# Altium PCB OpenDriver.PcbDoc (part 1 of 2)
Units mil, origin at the board's own origin, x right, y up, seen from the top; angles counter-clockwise.
Board outline 3900 x 2100 mil, 2 copper layers (Top Layer, Bottom Layer); 70 components, 50 nets, 317 pads, 234 vias.
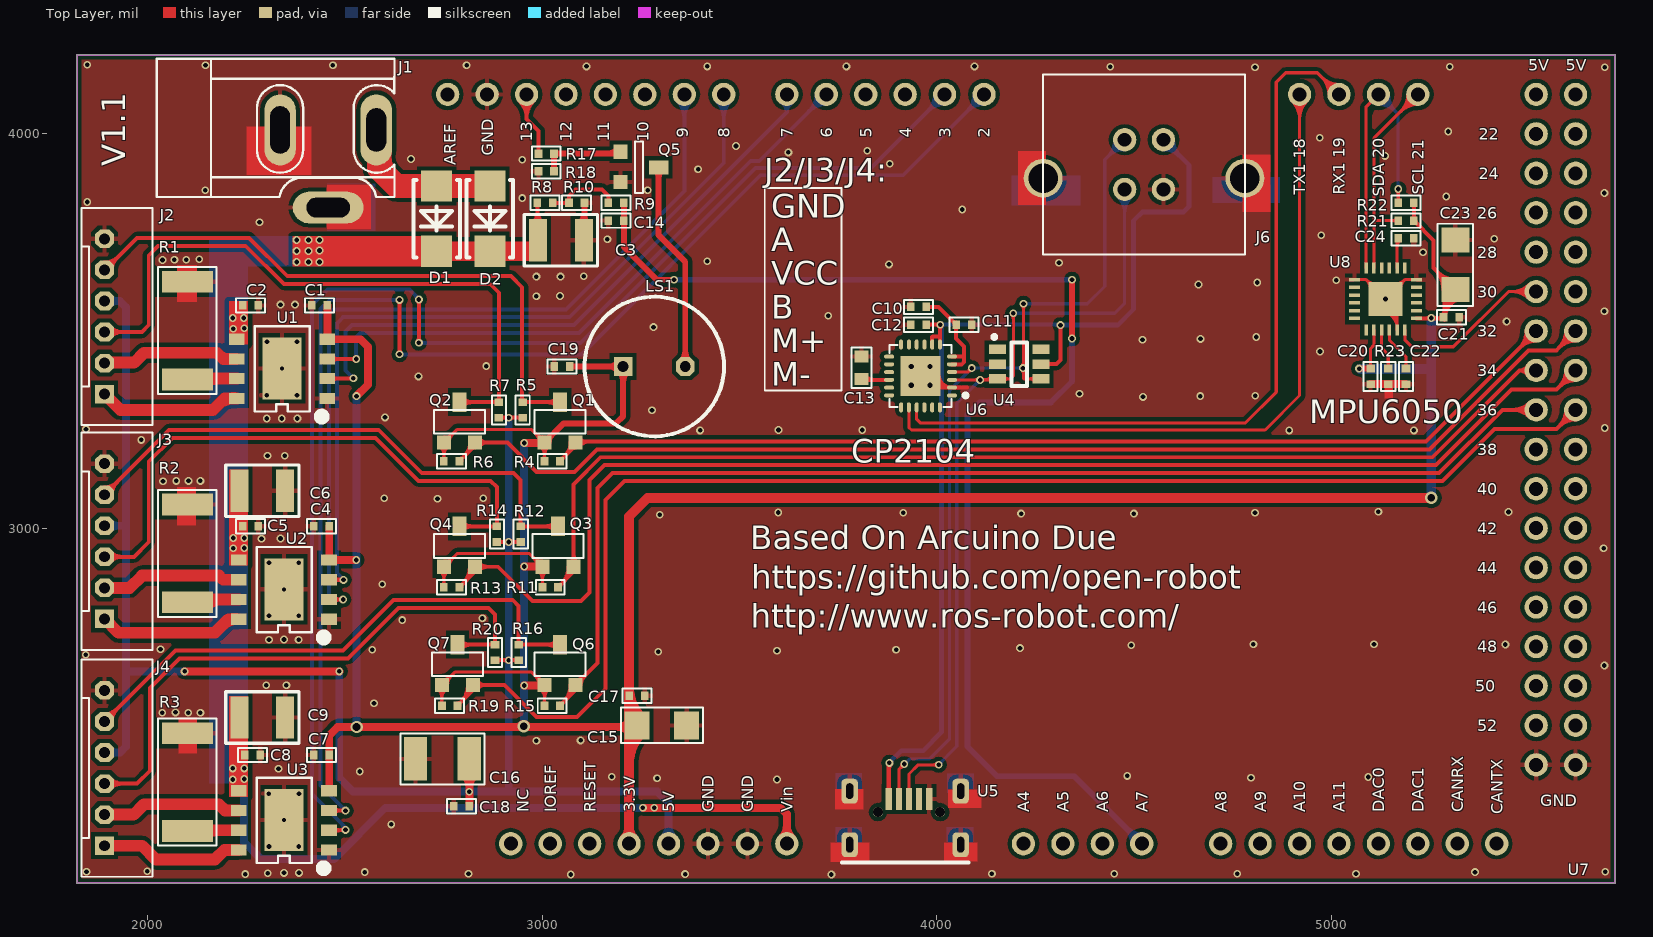
[diagram p0: Top Layer view]
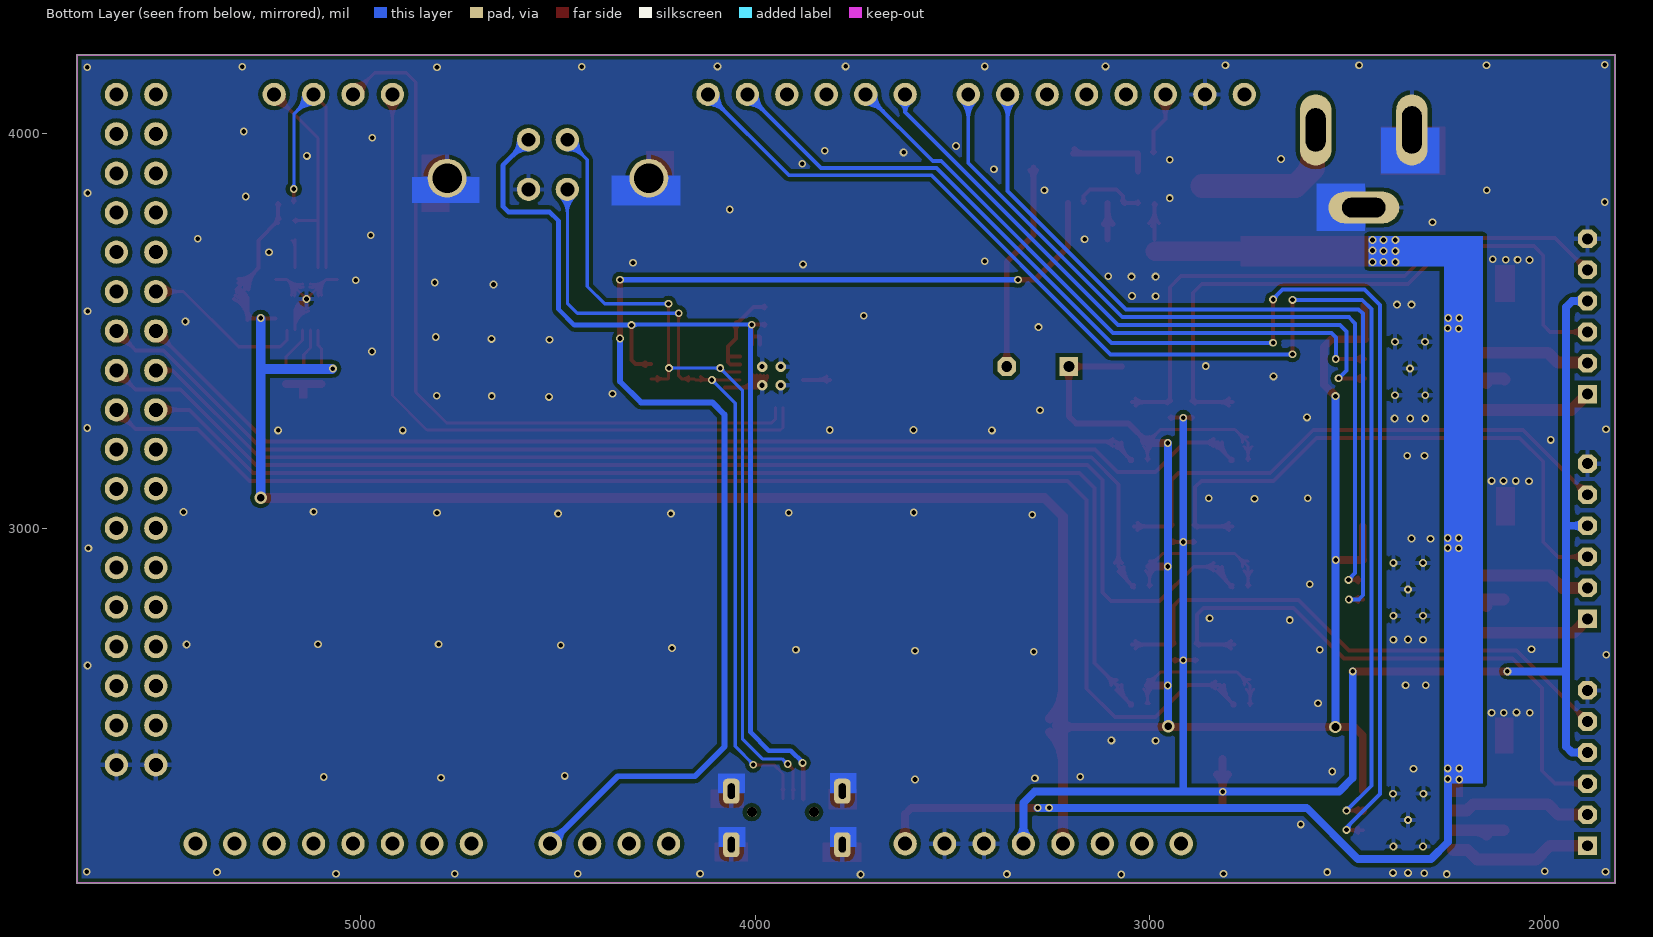
[diagram p1: Bottom Layer view, seen from below]

## Layer stack, top to bottom
Top Layer: signal copper 1.4
Dielectric: dielectric 12.6, FR-4, Dk 4.8
Bottom Layer: signal copper 1.4

## Board outline
1820,4200 1820,2100 5720,2100 5720,4200 1820,4200

## Design rules (kind name [scope] priority, off if disabled: settings)
Clearance [All] p1: gap=10
HoleSize [All] p1: absolutevalues=TRUE maxlimit=100 minlimit=11.81 maxpercent=80.000 minpercent=20.000
MinimumSolderMaskSliver [All] p1: minsoldermaskwidth=1
PlaneConnect [All] p1: planeconnectstyle=Relief reliefexpansion=20 reliefentries=4 reliefconductorwidth=12 reliefairgap=10
PolygonConnect [All] p1: connectstyle=Relief reliefconductorwidth=12 reliefentries=4 polygonreliefangle="90 Angle"
RoomDefinition CP2104 [InComponentClass('CP2104')] p1: confinementstyle=ConfineIn formatcopy=TRUE lockcomponents=FALSE outline 0,0 2000,0 2000,1000 0,1000
RoomDefinition OpenDriver [InComponentClass('OpenDriver')] p2: confinementstyle=ConfineIn formatcopy=TRUE lockcomponents=FALSE outline 0,0 2000,0 2000,1000 0,1000
RoomDefinition MPU6050 [InComponentClass('MPU6050')] p3: confinementstyle=ConfineIn formatcopy=TRUE lockcomponents=FALSE outline 0,0 2000,0 2000,1000 0,1000
RoomDefinition ArduinoDue [InComponentClass('ArduinoDue')] p4: confinementstyle=ConfineIn formatcopy=TRUE lockcomponents=FALSE outline 0,0 2000,0 2000,1000 0,1000
RoomDefinition A4950 [InComponentClass('A4950')] p5: confinementstyle=ConfineIn formatcopy=TRUE lockcomponents=FALSE outline 0,0 2000,0 2000,1000 0,1000
RoutingVias [All] p1: holewidth=28 width=50 viastyle="Through Hole" minholewidth=28 minwidth=50 maxholewidth=28 maxwidth=50
SilkToSilkClearance [All] p1: silktosilkclearance=0
SilkscreenOverComponentPads [All] p1: minsilkscreentomaskgap=0
SolderMaskExpansion [All] p1: expansion=4
TestPointUsage [All] p1: valid=0 allowmultiple=FALSE
Testpoint [All] p1: side=15 testpointundercomponent=TRUE minsize=40 maxsize=100 preferedsize=60 minholesize=0 maxholesize=40 preferedholesize=32 testpointgrid=1 style=1023 order=0123456789
Width [All] p1: maxlimit=100 minlimit=6 preferedwidth=10
19 further rules are at their usual default settings.

## Classes and differential pairs
component class OpenDriver: D1 D2 J1 J2 J3 J4
component class MPU6050: C20 C21 C22 C23 C24 R21 R22 R23 U8
component class CP2104: C10 C11 C12 C13 J6 U4 U5 U6
component class ArduinoDue: C14 C15 C16 C17 C18 C19 LS1 Q1 Q2 Q3 Q4 Q5 Q6 Q7 R4 R5 R6 R7 R8 R9 R10 R11 R12 R13 R14 R15 R16 R17 R18 R19 R20 U7
component class A4950: C1 C2 C3 C4 C5 C6 C7 C8 C9 R1 R2 R3 U1 U2 U3

## Components (designator, comment, footprint, x,y, rotation, side; value= is the part's Value field where it differs from the comment)
C1 "Cap" "dq - 0402" 2435,3565 r0 top
C2 "Cap" "dq - 0402" 2260,3565 r180 top
C3 "Cap" "dq - 1210" 3047,3730 r180 top
C4 "Cap" "dq - 0402" 2440,3005 r0 top
C5 "Cap" "dq - 0402" 2260,3005 r180 top
C6 "Cap" "dq - 1210" 2290,3095 r180 top
C7 "Cap" "dq - 0402" 2440,2425 r0 top
C8 "Cap" "dq - 0402" 2265,2425 r180 top
C9 "Cap" "dq - 1210" 2290,2520 r180 top
C10 "Cap" "dq - 0402" 3954,3561 r0 top
C11 "Cap" "dq - 0402" 4069,3516 r180 top
C12 "Cap" "dq - 0402" 3954,3516 r0 top
C13 "Cap" "dq - 0603" 3809,3406 r90 top
C14 "Cap" "dq - 0402" 3187,3780 r0 top
C15 "Cap_Pol" 3216-18 3240,2500 r0 top
C16 "Cap_Pol" 3528-21 2815,2415 r270 top
C17 "Cap" "dq - 0402" 3240,2575 r180 top
C18 "Cap" "dq - 0402" 2795,2295 r0 top
C19 "Cap" "dq - 0402" 3050,3410 r0 top
C20 "Cap" "dq - 0402" 5100,3385 r90 top
C21 "Cap" "dq - 0402" 5305,3535 r180 top
C22 "Cap" "dq - 0402" 5190,3385 r270 top
C23 "Cap_Pol" 3216-18 5315,3605 r90 top
C24 "Cap" "dq - 0402" 5190,3735 r0 top
D1 "SS54" LC-SMA(DO-214AC)_S2 2732,3785 r90 top
D2 "SS54" LC-SMA(DO-214AC)_S2 2867,3785 r90 top
J1 "DC-005 5.5-2.5mm" DC10B 2160,3840 r0 top
J2 "PH2.0-6P" PH-6P 1890,3340 r90 top
J3 "PH2.0-6P" PH-6P 1890,2770 r90 top
J4 "PH2.0-6P" PH-6P 1890,2195 r90 top
J6 "USB" USB-Square-Vertical 4575,3985 r0 top
LS1 "9*4.2mm" BUZZER-9*4.2MM 3205,3410 r0 top
Q1 "AO3400" "SOT-23-3 - AO3400" 3045,3300 r0 top
Q2 "AO3400" "SOT-23-3 - AO3400" 2790,3300 r0 top
Q3 "AO3400" "SOT-23-3 - AO3400" 3040,2985 r0 top
Q4 "AO3400" "SOT-23-3 - AO3400" 2790,2985 r0 top
Q5 "8050" SOT-23-3 3295,3915 r270 top
Q6 "AO3400" "SOT-23-3 - AO3400" 3045,2685 r0 top
Q7 "AO3400" "SOT-23-3 - AO3400" 2785,2685 r0 top
R1 "Res" "DQ - 2512" 2100,3625 r270 top
R2 "Res" "DQ - 2512" 2100,3060 r270 top
R3 "Res" "DQ - 2512" 2100,2480 r270 top
R4 "Res" "dq - 0402" 3025,3170 r0 top
R5 "Res" "dq - 0402" 2950,3300 r90 top
R6 "Res" "dq - 0402" 2770,3170 r0 top
R7 "Res" "dq - 0402" 2890,3300 r90 top
R8 "Res" "dq - 0402" 3007,3825 r0 top
R9 "Res" "dq - 0402" 3187,3825 r0 top
R10 "Res" "dq - 0402" 3087,3825 r0 top
R11 "Res" "dq - 0402" 3020,2850 r0 top
R12 "Res" "dq - 0402" 2945,2985 r90 top
R13 "Res" "dq - 0402" 2770,2850 r0 top
R14 "Res" "dq - 0402" 2885,2985 r90 top
R15 "Res" "dq - 0402" 3025,2550 r0 top
R16 "Res" "dq - 0402" 2940,2685 r90 top
R17 "Res" "dq - 0402" 3010,3950 r180 top
R18 "Res" "dq - 0402" 3010,3905 r180 top
R19 "Res" "dq - 0402" 2765,2550 r0 top
R20 "Res" "dq - 0402" 2880,2685 r90 top
R21 "Res" "dq - 0402" 5190,3780 r180 top
R22 "Res" "dq - 0402" 5190,3825 r180 top
R23 "Res" "dq - 0402" 5145,3385 r90 top
U1 "A4950" LC-SOIC-8_150mil 2340,3405 r180 top
U2 "A4950" LC-SOIC-8_150mil 2345,2845 r180 top
U3 "A4950" LC-SOIC-8_150mil 2345,2260 r180 top
U4 "SRV05-4.TCT" LC-SOT-23-6 4209,3416 r180 top
U5 "Micro-USB-N" MICRO-USB-F 3920,2225 r0 top
U6 "CP2104" "QFN24 - T" 3959,3386 r180 top
U7 "ArduinoDue" ArduinoDue 1820,2100 r0 top locked
U8 "MPU6050" QFN-24 5075,3650 r0 top

## Footprints (in the part's own frame and the unit in brackets; to place one, negate y for a bottom-side part, rotate by r counter-clockwise, add the part's x,y. Pads: shape width x height; smd on the part's side, far side on the other; paste and mask are expansions set on the pad)
3216-18 [mm] "http://eelab.sjtu.edu.cn/news/show.aspx?id=536&cid=8"
  rect 1.6x1.8 smd: 1(0,0) 2(3.2,0)
  silkscreen extent -1.04,-1.14 4.24,1.14, body extent 0,-0.8 3.2,0.8, height 1.6
3528-21 [mm] "22uF/16V, 10uF/25V, B型钽电容"
  rect 2.8x1.5 smd: 1(0,0) 2(0,-3.475)
  silkscreen extent -1.65,-4.45 1.65,0.97, body extent -1.49,-3.57 1.51,0.13, height 2.1
ArduinoDue [mm]
  round 1.5 hole 0.9: 1(27.94,2.54) 2(30.48,2.54) 3(33.02,2.54) 4(35.56,2.54) 5(38.1,2.54) 6(40.64,2.54) 7(43.18,2.54) 8(45.72,2.54) 13(60.96,2.54) 14(63.5,2.54) 15(66.04,2.54) 16(68.58,2.54) 17(73.66,2.54) 18(76.2,2.54) 19(78.74,2.54) 20(81.28,2.54) 21(83.82,2.54) 22(86.36,2.54) 23(88.9,2.54) 24(91.44,2.54) 25(86.36,50.8) 26(83.82,50.8) 27(81.28,50.8) 28(78.74,50.8) 35(58.42,50.8) 36(55.88,50.8) 37(53.34,50.8) 38(50.8,50.8) 39(48.26,50.8) 40(45.72,50.8) 41(41.656,50.8) 42(39.116,50.8) 43(36.576,50.8) 44(34.036,50.8) 45(31.496,50.8) 46(28.956,50.8) 47(26.416,50.8) 48(23.876,50.8) 51(93.98,50.8) 52(96.52,50.8) 53(93.98,48.26) 54(96.52,48.26) 55(93.98,45.72) 56(96.52,45.72) 57(93.98,43.18) 58(96.52,43.18) 59(93.98,40.64) 60(96.52,40.64) 61(93.98,38.1) 62(96.52,38.1) 63(93.98,35.56) 64(96.52,35.56) 65(93.98,33.02) 66(96.52,33.02) 67(93.98,30.48) 68(96.52,30.48) 69(93.98,27.94) 70(96.52,27.94) 71(93.98,25.4) 72(96.52,25.4) 73(93.98,22.86) 74(96.52,22.86) 75(93.98,20.32) 76(96.52,20.32) 77(93.98,17.78) 78(96.52,17.78) 79(93.98,15.24) 80(96.52,15.24) 81(93.98,12.7) 82(96.52,12.7) 83(93.98,10.16) 84(96.52,10.16) 85(93.98,7.62) 86(96.52,7.62)
  Keep-Out Layer lines w0.127: 0,0 0,53.34 99.06,53.34 99.06,0 0,0
BUZZER-9*4.2MM [mm] "https://item.taobao.com/item.htm?spm=a230r.1.14.111.cDfJ59&id=20592199756&ns=1&abbucket=4#detail"
  rect 1.2x1.2 hole 0.7: 1(0,0)
  oct 1.2x1.2 hole 0.7: 2(4,0)
  silkscreen extent -2.5,-4.5 6.5,4.5, body extent -2.46,-4.5 6.5,4.48, height 4.2
DC10B [mil]
  oval 80x180 hole 50 slot 110 at 90 deg: 1(419.09,170)
  oval 80x180 hole 50 slot 120 at 90 deg: 2(175,170)
  oval 180x80 hole 50 slot 110 at 0 deg: 3(297.05,-26.85)
  silkscreen extent -138,0 465,350
"dq - 0402" [mm]
  rect 0.5x0.55 smd: 1(-0.5,0) 2(0.5,0)
  silkscreen extent -0.93,-0.46 0.93,0.46, body extent -0.51,-0.27 0.52,0.27, height 0.55
"dq - 0603" [mm]
  rect 0.762x0.9 smd: 1(-0.71,0) 2(0.75,0)
  silkscreen extent -1.28,-0.64 1.32,0.64, body extent -0.8,-0.45 0.81,0.45, height 0.9
"dq - 1210" [mm]
  rect 1.16x2.72 smd: 1(-1.475,0) 2(1.475,0)
  silkscreen extent -2.35,-1.66 2.36,1.66, body extent -1.6,-1.25 1.6,1.25, height 0.6
"DQ - 2512" [mm]
  rect 1.4x3.3 smd: 1(0,0) 2(6.3,0)
  silkscreen extent -0.94,-1.88 7.24,1.88, body extent 0,-1.57 6.3,1.55, height 0.55
LC-SMA(DO-214AC)_S2 [mm]
  rect 2x2 smd: 1(2.1,0) 2(-2.1,0)
  silkscreen extent -2.5,-1.5 2.5,1.5, body extent -2.2,-1.3 2.2,1.3, height 2
LC-SOIC-8_150mil [mm]
  rect 1x0.72 smd: 1(-2.898,1.925) 2(-2.898,0.655) 3(-2.898,-0.615) 4(-2.898,-1.885) 5(2.902,-1.885) 6(2.902,-0.615) 7(2.902,0.655) 8(2.902,1.925)
  rect 2.5x4 smd: 9(0,0)
  silkscreen extent -2.81,-2.73 1.75,3.35, body extent -1.9,-2.5 2.1,2.5, height 1.73
LC-SOT-23-6 [mm]
  rect 1.1x0.6 smd: 1(1.4,-0.95) 2(1.4,0) 3(1.4,0.95) 4(-1.4,0.95) 5(-1.4,0) 6(-1.4,-0.95)
  silkscreen extent -0.5,-1.87 1.72,1.4, body extent -0.89,-1.55 0.89,1.54, height 1.45
MICRO-USB-F [mm]
  round 0.65 hole 0.65: 0(-1.75,1.4) 0(2.25,1.4)
  rect 0.4x1.4 smd: 1(-1.05,2.25) 2(-0.403,2.25) 3(0.246,2.25) 4(0.897,2.25) 5(1.546,2.25)
  rrect50% 1.05x1.6 hole 0.45 slot 1 at 90 deg: 6(3.575,-0.7) 7(3.575,2.75) 8(-3.575,2.75) 9(-3.575,-0.7)
  silkscreen extent -4.08,-1.85 4.08,-1.85
PH-6P [mm] "https://item.taobao.com/item.htm?spm=a230r.1.14.30.U3UT7w&id=522574797086&ns=1&abbucket=4#detail"
  rect 1.2x1.2 hole 0.7: 1(0,0)
  oct 1.2x1.2 hole 0.7: 2(2,0) 3(4,0) 4(6,0) 5(8,0) 6(10,0)
  silkscreen extent -2,-3.1 12,1.5
"QFN24 - T" [mm]
  oval 0.65x0.25 smd: 1(-2.025,1.25) 2(-2.025,0.75) 3(-2.025,0.25) 4(-2.025,-0.25) 5(-2.025,-0.75) 6(-2.025,-1.25) 13(2.025,-1.25) 14(2.025,-0.75) 15(2.025,-0.25) 16(2.025,0.25) 17(2.025,0.75) 18(2.025,1.25)
  oval 0.25x0.65 smd: 7(-1.25,-2.025) 8(-0.75,-2.025) 9(-0.25,-2.025) 10(0.25,-2.025) 11(0.75,-2.025) 12(1.25,-2.025) 19(1.25,2.025) 20(0.75,2.025) 21(0.25,2.025) 22(-0.25,2.025) 23(-0.75,2.025) 24(-1.25,2.025)
  rect 2.6x2.6 smd: 25(0,0)
  silkscreen extent -3.03,-2 2,2, body extent -2,-2 2,2, height 0.8
QFN-24 [mm]
  rect 0.7x0.22 smd: 1(-0.4,-0.5) 2(-0.4,-1) 3(-0.4,-1.5) 4(-0.4,-2) 5(-0.4,-2.5) 6(-0.4,-3) 13(3.6,-3) 14(3.6,-2.5) 15(3.6,-2) 16(3.6,-1.5) 17(3.6,-1) 18(3.6,-0.5)
  round 0.4 on Top Overlay: 1(-0.375,0.025)
  rect 0.22x0.7 smd: 7(0.35,-3.75) 8(0.85,-3.75) 9(1.35,-3.75) 10(1.85,-3.75) 11(2.35,-3.75) 12(2.85,-3.75) 19(2.85,0.25) 20(2.35,0.25) 21(1.85,0.25) 22(1.35,0.25) 23(0.85,0.25) 24(0.35,0.25)
  rect 2.2x2.2 smd: 25(1.6,-1.75)
SOT-23-3 [mm]
  rect 0.915x0.915 smd: 1(0.95,-2.45) 2(-1,-2.45)
  rect 0.915x1.27 smd: 3(0,0)
  silkscreen extent -1.65,-1.52 1.65,-1.02, body extent -1.55,-2 1.55,-0.5, height 1.15
"SOT-23-3 - AO3400" [mm]
  rect 0.915x0.915 smd: 1(-1,-2.1) 3(1,-2.1)
  rect 0.915x1.27 smd: 2(0,0.5)
  silkscreen extent -1.65,-1.52 1.65,0, body extent -1.55,-1.5 1.55,0, height 1.15
USB-Square-Vertical [mm]
  round 1.5 hole 0.9: 1(0,0) 2(-2.5,0) 3(-2.5,-3.2) 4(0,-3.2)
  round 2.5 hole 1.9: 5(5.25,-2.475) 6(-7.75,-2.475)
  silkscreen extent -7.75,-7.4 5.25,4.2, body extent -7.7,-7.3 5.2,4.1, height 16

## Part data
C1 C2 C3 C4 C5 C6 C7 C8 C9 C10 C11 C12 C13 C14 C17 C18 C19 C20 C21 C22 C24: library part DQ_Cap, "Capacitor"
C15 C16 C23: "Capacitor"
D1 D2: library part Diode1
J1: library part DC-005
J2 J3 J4: library part PH2.0_6P
LS1: library part Buzzer_1, "Electrical Bell"
Q1 Q2 Q3 Q4 Q6 Q7: library part NMOS, "N-Channel Power MOSFET"
Q5: library part NPN
R1 R2 R3 R4 R5 R6 R7 R8 R9 R10 R11 R12 R13 R14 R15 R16 R17 R18 R19 R20 R21 R22 R23: library part DQ_Res, "Resistance"

## Via types
v1: diameter 19.68, hole 11.81, Top Layer to Bottom Layer, tented both sides, 224 vias
v2: diameter 25.98, hole 12.99, Top Layer to Bottom Layer, tented both sides, 4 vias
v3: diameter 20, hole 10, Top Layer to Bottom Layer, 3 vias
v4: diameter 31.5, hole 19.68, Top Layer to Bottom Layer, tented both sides, 3 vias

## Nets (pads, with @x,y where several pads share a name; then routed paths per layer and width w, separated by ;. In a path a pad name is that pad's centre, name@x,y a point inside that pad or via, vN(x,y) a via of type N, cw(c..) or ccw(c..) an arc to the next point about the centre after c; other vN are vias at no path point)
3.3V: C1.2 C4.2 C7.2 C15.1 C17.2 C19.2 C20.2 C21.2 C23.1 LS1.1 Q1.1 Q2.1 Q3.1 Q4.1 Q6.1 Q7.1 R4.1 R6.1 R11.1 R13.1 R15.1 R19.1 R21.1 R22.1 U1.4 U2.4 U3.4 U7.4 U8.8 U8.13 | length 12691.6
  Top Layer w8: R19.1@2745.32,2550 Q7.1@2745.32,2602.01 ; Q7.1@2745.63,2602.32 2778.31,2635 2972.95,2635 Q6.1@3005.63,2602.32 R15.1@3005.63,2555.31 ; R13.1@2750.63,2849.69 Q4.1@2750.63,2902.32 2784.31,2936 2966.95,2936 2999.95,2903 Q3.1@3000.63,2902.32 ; R6.1@2750.63,3170.31 Q2.1@2750.63,3217.32 2783.31,3250 2972.95,3250 Q1.1@3005.63,3217.32 R4.1@3005.63,3170.31 ; R11.1@3000.32,2850 Q3.1@3000.32,2902.01 ; C20.2@5100,3404.68 5100,3455 5108.46,3463.46 U8.8@5108.46,3502.36 ; 2745.32,2565.09 ccw(c2759.42,2565.09) 2749.45,2555.12 cw(c2759.42,2565.09) 2745.32,2565.09 ; 2745.32,2565.09 cw(c2731.21,2565.09) 2741.18,2555.12 ccw(c2731.21,2565.09) 2745.32,2565.09 ; 2750.63,2868.5 ccw(c2716.8,2868.5) 2740.72,2892.41 cw(c2716.8,2868.5) 2750.63,2868.5 ; 2750.63,2868.5 cw(c2784.46,2868.5) 2760.54,2892.41 ccw(c2784.46,2868.5) 2750.63,2868.5 ; 2750.63,3183.5 ccw(c2716.8,3183.5) 2740.72,3207.41 cw(c2716.8,3183.5) 2750.63,3183.5 ; 2750.63,3183.5 cw(c2784.46,3183.5) 2760.54,3207.41 ccw(c2784.46,3183.5) 2750.63,3183.5 ; 2769.55,2626.24 ccw(c2793.47,2602.32) 2759.64,2602.32 cw(c2793.47,2602.32) 2769.55,2626.24 ; 2769.55,2626.24 cw(c2745.63,2650.16) 2745.63,2616.33 ccw(c2745.63,2650.16) 2769.55,2626.24 ; 2774.55,2926.24 ccw(c2798.47,2902.32) 2764.64,2902.32 cw(c2798.47,2902.32) 2774.55,2926.24 ; 2774.55,2926.24 cw(c2750.63,2950.16) 2750.63,2916.33 ccw(c2750.63,2950.16) 2774.55,2926.24 ; 2774.55,3241.24 ccw(c2798.47,3217.32) 2764.64,3217.32 cw(c2798.47,3217.32) 2774.55,3241.24 ; 2774.55,3241.24 cw(c2750.63,3265.16) 2750.63,3231.33 ccw(c2750.63,3265.16) 2774.55,3241.24 ; 2976.71,2926.24 ccw(c3000.63,2950.16) 3000.63,2916.33 cw(c3000.63,2950.16) 2976.71,2926.24 ; 2976.71,2926.24 cw(c2952.79,2902.32) 2986.62,2902.32 ccw(c2952.79,2902.32) 2976.71,2926.24 ; 2981.71,2626.24 ccw(c3005.63,2650.16) 3005.63,2616.33 cw(c3005.63,2650.16) 2981.71,2626.24 ; 2981.71,2626.24 cw(c2957.79,2602.32) 2991.62,2602.32 ccw(c2957.79,2602.32) 2981.71,2626.24 ; 2981.71,3241.24 ccw(c3005.63,3265.16) 3005.63,3231.33 cw(c3005.63,3265.16) 2981.71,3241.24 ; 2981.71,3241.24 cw(c2957.79,3217.32) 2991.62,3217.32 ccw(c2957.79,3217.32) 2981.71,3241.24 ; 3000.32,2865.09 ccw(c3014.42,2865.09) 3004.45,2855.12 cw(c3014.42,2865.09) 3000.32,2865.09 ; 3000.32,2865.09 cw(c2986.21,2865.09) 2996.18,2855.12 ccw(c2986.21,2865.09) 3000.32,2865.09 ; 3005.63,2568.5 ccw(c2971.8,2568.5) 2995.72,2592.41 cw(c2971.8,2568.5) 3005.63,2568.5 ; 3005.63,2568.5 cw(c3039.46,2568.5) 3015.54,2592.41 ccw(c3039.46,2568.5) 3005.63,2568.5 ; 3005.63,3183.5 ccw(c2971.8,3183.5) 2995.72,3207.41 cw(c2971.8,3183.5) 3005.63,3183.5 ; 3005.63,3183.5 cw(c3039.46,3183.5) 3015.54,3207.41 ccw(c3039.46,3183.5) 3005.63,3183.5 ; 5100,3418.79 ccw(c5114.1,3418.79) 5104.13,3408.82 cw(c5114.1,3418.79) 5100,3418.79 ; 5100,3418.79 cw(c5085.9,3418.79) 5095.87,3408.82 ccw(c5085.9,3418.79) 5100,3418.79 ; Q7.1@2735.72,2592.41 cw(c2712.56,2569.26) 2745.32,2569.26 ccw(c2712.56,2569.26) Q7.1@2735.72,2592.41 ; 2745.32,2567.74 cw(c2780.22,2567.74) 2755.54,2592.41 ccw(c2780.22,2567.74) 2745.32,2567.74 ; R13.1@2746.18,2855.12 ccw(c2735.45,2865.85) 2750.63,2865.85 cw(c2735.45,2865.85) R13.1@2746.18,2855.12 ; R6.1@2746.18,3175.12 ccw(c2735.45,3185.85) 2750.63,3185.85 cw(c2735.45,3185.85) R6.1@2746.18,3175.12 ; 2750.63,2864.33 ccw(c2763.66,2864.33) 2754.45,2855.12 cw(c2763.66,2864.33) 2750.63,2864.33 ; 2750.63,3184.33 ccw(c2763.66,3184.33) 2754.45,3175.12 cw(c2763.66,3184.33) 2750.63,3184.33 ; Q3.1@2990.72,2892.41 cw(c2967.56,2869.26) 3000.32,2869.26 ccw(c2967.56,2869.26) Q3.1@2990.72,2892.41 ; 3000.32,2867.74 cw(c3035.22,2867.74) 3010.54,2892.41 ccw(c3035.22,2867.74) 3000.32,2867.74 ; R15.1@3001.18,2555.12 ccw(c2990.45,2565.85) 3005.63,2565.85 cw(c2990.45,2565.85) R15.1@3001.18,2555.12 ; R4.1@3001.18,3175.12 ccw(c2990.45,3185.85) 3005.63,3185.85 cw(c2990.45,3185.85) R4.1@3001.18,3175.12 ; 3005.63,2564.33 ccw(c3018.66,2564.33) 3009.45,2555.12 cw(c3018.66,2564.33) 3005.63,2564.33 ; 3005.63,3184.33 ccw(c3018.66,3184.33) 3009.45,3175.12 cw(c3018.66,3184.33) 3005.63,3184.33
  Top Layer w10: R22.1@5209.69,3825 R21.1@5209.69,3780 5260,3729.68 5260,3660 C23.1@5315,3605 ; U8.13@5216.73,3531.89 5287.2,3531.89 C23.1@5287.2,3585 ; 5209.68,3792.68 ccw(c5221.38,3792.68) 5213.11,3784.41 cw(c5221.38,3792.68) 5209.68,3792.68 ; 5209.69,3792.68 cw(c5197.99,3792.68) 5206.26,3784.41 ccw(c5197.99,3792.68) 5209.69,3792.68 ; 5209.69,3812.32 ccw(c5197.99,3812.32) 5206.26,3820.59 cw(c5197.99,3812.32) 5209.69,3812.32 ; 5209.68,3812.32 cw(c5221.38,3812.32) 5213.11,3820.59 ccw(c5221.38,3812.32) 5209.68,3812.32 ; R21.1@5209.69,3774.17 cw(c5209.69,3760.11) 5219.63,3770.05 ccw(c5209.69,3760.11) R21.1@5209.69,3774.17 ; R21.1@5214.53,3779.02 ccw(c5223.84,3779.02) 5217.26,3772.43 cw(c5223.84,3779.02) R21.1@5214.53,3779.02 ; 5239.63,3531.89 ccw(c5239.63,3547.37) 5250.58,3536.42 cw(c5239.63,3547.37) 5239.63,3531.89 ; v1@5257.42,3536.42 ccw(c5268.37,3547.37) 5268.37,3531.89 cw(c5268.37,3547.37) v1@5257.42,3536.42 ; 5263.05,3656.95 cw(c5211.1,3605) 5284.57,3605 ccw(c5211.1,3605) 5263.05,3656.95 ; 5268.49,3531.89 ccw(c5268.49,3550.84) 5281.89,3537.44 cw(c5268.49,3550.84) 5268.49,3531.89 ; 5272.55,3647.45 ccw(c5311.06,3685.96) 5311.06,3631.5 cw(c5311.06,3685.96) 5272.55,3647.45 ; 5280.12,3639.88 cw(c5245.24,3605) 5294.57,3605 ccw(c5245.24,3605) 5280.12,3639.88 ; C21.2@5281.89,3539.41 ccw(c5269.06,3552.24) 5287.2,3552.24 cw(c5269.06,3552.24) C21.2@5281.89,3539.41 ; C21.2@5287.2,3528.1 cw(c5344.61,3528.1) 5321.66,3580.71 ccw(c5344.61,3528.1) C21.2@5287.2,3528.1 ; C21.2@5287.2,3543.37 cw(c5337.95,3543.37) 5317.66,3589.88 ccw(c5337.95,3543.37) C21.2@5287.2,3543.37 ; 5287.2,3558.64 cw(c5331.29,3558.64) 5313.66,3599.05 ccw(c5331.29,3558.64) 5287.2,3558.64 ; C23.1@5287.2,3573.91 cw(c5324.62,3573.91) 5309.66,3608.21 ccw(c5324.62,3573.91) C23.1@5287.2,3573.91 ; C23.1@5289.62,3630.38 ccw(c5311.06,3651.82) 5311.06,3621.5 cw(c5311.06,3651.82) C23.1@5289.62,3630.38
  Top Layer w15: Q1.1@3005.63,3217.32 3054.31,3266 3187,3266 3205,3284 LS1.1@3205,3410 C19.2@3069.68,3410 ; v1@5069.69,3404.68 v1(5071,3404.68) C20.2@5100,3404.68 ; Q1.1@3023.57,3235.27 ccw(c3041.52,3217.32) 3016.14,3217.32 cw(c3041.52,3217.32) Q1.1@3023.57,3235.27 ; Q1.1@3023.57,3235.27 cw(c3005.63,3253.21) 3005.63,3227.83 ccw(c3005.63,3253.21) Q1.1@3023.57,3235.27 ; 3166.08,3410 ccw(c3166.08,3448.92) 3193.6,3421.4 cw(c3166.08,3448.92) 3166.08,3410 ; 3166.08,3410 cw(c3166.08,3371.08) LS1.1@3193.6,3398.6 ; 3166.08,3410 cw(c3166.08,3371.08) LS1.1@3193.6,3398.6 ; LS1.1@3193.6,3398.6 cw(c3166.08,3371.08) 3205,3371.08 ; LS1.1@3193.6,3398.6 cw(c3166.08,3371.08) 3205,3371.08 ; 3205,3371.08 cw(c3243.92,3371.08) 3216.4,3398.6 ccw(c3243.92,3371.08) 3205,3371.08
  Top Layer w20: U1.4@2454.1,3479.22 U1.4@2455.1,3479.22 ; C1.2@2455.1,3564.42 U1.4@2455.1,3479.22 ; U2.4@2459.1,2919.22 v1(2528.22,2919.22) ; U3.4@2459.68,2334.8 C7.2@2459.68,2425 2459.68,2474.68 2481,2496 v4(2529,2496) C15.1@3219,2496 ; U2.4@2459.68,2919.8 C4.2@2459.68,3005 ; v1(2529,3335) 2557.84,3363.84 2557.84,3460.16 2538.78,3479.22 U1.4@2455.1,3479.22 ; v1(2954,2601) Q6.1@3004.31,2601 ; v1(2954,2903) Q3.1@2999.95,2903 ; v1(2954,3216) Q1.1@3004.31,3216 ; 2934.29,2496 ccw(c2934.29,2516.71) 2948.94,2502.06 cw(c2934.29,2516.71) 2934.29,2496 ; v4@2957.06,2502.06 ccw(c2971.71,2516.71) 2971.71,2496 cw(c2971.71,2516.71) v4@2957.06,2502.06 ; 2979.65,2903 cw(c2979.65,2881.35) 2994.96,2896.66 ccw(c2979.65,2881.35) 2979.65,2903 ; 2983.09,2601 ccw(c2983.09,2624.86) 2999.96,2607.99 cw(c2983.09,2624.86) 2983.09,2601 ; 2983.09,3216 ccw(c2983.09,3239.86) 2999.96,3222.99 cw(c2983.09,3239.86) 2983.09,3216 ; 3187.95,2496 ccw(c3187.95,2548.11) 3224.8,2511.26 cw(c3187.95,2548.11) 3187.95,2496 ; 3188.26,2496 cw(c3188.26,2444.32) 3224.8,2480.86 ccw(c3188.26,2444.32) 3188.26,2496
  Top Layer w25: U7.4@3220,2200 3220,3030 3267,3077 v4(5254,3077) v4@5255,3077 ; 3220,2241.11 ccw(c3261.11,2241.11) 3232.04,2212.04 cw(c3261.11,2241.11) 3220,2241.11 ; 3220,2241.11 cw(c3178.89,2241.11) 3207.96,2212.04 ccw(c3178.89,2241.11) 3220,2241.11 ; 3220,2401.92 cw(c3334.14,2401.92) 3253.43,2482.63 ccw(c3334.14,2401.92) 3220,2401.92 ; 3220,2462.27 cw(c3273.79,2462.27) 3235.75,2500.31 ccw(c3273.79,2462.27) 3220,2462.27 ; 3220,2537.73 ccw(c3273.79,2537.73) 3235.75,2499.69 cw(c3273.79,2537.73) 3220,2537.73 ; 3220,2598.08 ccw(c3334.14,2598.08) 3253.43,2517.37 cw(c3334.14,2598.08) 3220,2598.08
  Bottom Layer w20: v4(2529,2496) v1(2529,3335) ; v4@2954,2497 v1(2954,2601) v1(2954,2903) v1(2954,3216) ; v4@2948.94,2502.06 ccw(c2936.71,2514.29) 2954,2514.29 cw(c2936.71,2514.29) v4@2948.94,2502.06
  Bottom Layer w25: v1@5073,3404 5254,3404 ; v4@5254,3075 v4(5254,3077) 5254,3404 ; 5254,3408 5254,3404 ; v1@5254,3531 5254,3404
  other v1: 5254,3533
  other v4: 2953,2498
5V: C16.1 C18.2 J2.4 J3.4 J4.4 R5.1 R7.1 R12.1 R14.1 R16.1 R20.1 U7.5 | length 5386
  Top Layer w10: R20.1@2880,2665.32 R16.1@2940,2665.32 ; R14.1@2885,2965.32 R12.1@2945,2965.32 ; R7.1@2890,3280.32 R5.1@2950,3280.32 ; 2892.68,2665.32 ccw(c2892.68,2653.62) 2884.41,2661.89 cw(c2892.68,2653.62) 2892.68,2665.32 ; 2892.68,2665.32 cw(c2892.68,2677.01) 2884.41,2668.74 ccw(c2892.68,2677.01) 2892.68,2665.32 ; 2897.68,2965.32 ccw(c2897.68,2953.62) 2889.41,2961.89 cw(c2897.68,2953.62) 2897.68,2965.32 ; 2897.68,2965.32 cw(c2897.68,2977.01) 2889.41,2968.74 ccw(c2897.68,2977.01) 2897.68,2965.32 ; 2902.68,3280.32 ccw(c2902.68,3268.62) 2894.41,3276.89 cw(c2902.68,3268.62) 2902.68,3280.32 ; 2902.68,3280.32 cw(c2902.68,3292.01) 2894.41,3283.74 ccw(c2902.68,3292.01) 2902.68,3280.32 ; 2927.32,2665.32 ccw(c2927.32,2677.01) 2935.59,2668.74 cw(c2927.32,2677.01) 2927.32,2665.32 ; 2927.32,2665.32 cw(c2927.32,2653.62) 2935.59,2661.89 ccw(c2927.32,2653.62) 2927.32,2665.32 ; 2932.32,2965.32 ccw(c2932.32,2977.01) 2940.59,2968.74 cw(c2932.32,2977.01) 2932.32,2965.32 ; 2932.32,2965.32 cw(c2932.32,2953.62) 2940.59,2961.89 ccw(c2932.32,2953.62) 2932.32,2965.32 ; 2937.32,3280.32 ccw(c2937.32,3292.01) 2945.59,3283.74 cw(c2937.32,3292.01) 2937.32,3280.32 ; 2937.32,3280.32 cw(c2937.32,3268.62) 2945.59,3276.89 ccw(c2937.32,3268.62) 2937.32,3280.32 ; 2902.55,2665.31 cw(c2902.55,2652.55) 2911.58,2661.58 ccw(c2902.55,2652.55) 2902.55,2665.31 ; 2902.55,2965.31 cw(c2902.55,2952.55) 2911.58,2961.58 ccw(c2902.55,2952.55) 2902.55,2965.31 ; 2902.55,3280.31 cw(c2902.55,3267.55) 2911.58,3276.58 ccw(c2902.55,3267.55) 2902.55,3280.31 ; 2904.07,2665.32 ccw(c2904.07,2675.93) 2911.58,2668.42 cw(c2904.07,2675.93) 2904.07,2665.32 ; 2904.07,2965.32 ccw(c2904.07,2975.93) 2911.58,2968.42 cw(c2904.07,2975.93) 2904.07,2965.32 ; 2904.07,3280.32 ccw(c2904.07,3290.93) 2911.58,3283.42 cw(c2904.07,3290.93) 2904.07,3280.32 ; v1@2918.42,2661.58 cw(c2927.45,2652.55) 2927.45,2665.31 ccw(c2927.45,2652.55) v1@2918.42,2661.58 ; v1@2918.42,2668.42 ccw(c2925.93,2675.93) 2925.93,2665.32 cw(c2925.93,2675.93) v1@2918.42,2668.42 ; v1@2918.42,2961.58 cw(c2927.45,2952.55) 2927.45,2965.31 ccw(c2927.45,2952.55) v1@2918.42,2961.58 ; v1@2918.42,2968.42 ccw(c2925.93,2975.93) 2925.93,2965.32 cw(c2925.93,2975.93) v1@2918.42,2968.42 ; v1@2918.42,3276.58 cw(c2927.45,3267.55) 2927.45,3280.31 ccw(c2927.45,3267.55) v1@2918.42,3276.58 ; v1@2918.42,3283.42 ccw(c2925.93,3290.93) 2925.93,3280.32 cw(c2925.93,3290.93) v1@2918.42,3283.42
  Top Layer w20: v1(2093,2637) v1(2485,2637) v1@2486,2637 ; C18.2@2815,2295.32 v1(2815,2332) C16.1@2815,2415 ; 2815,2342.27 ccw(c2767.86,2342.27) 2801.19,2375.6 cw(c2767.86,2342.27) 2815,2342.27 ; 2815,2342.27 cw(c2862.14,2342.27) 2828.81,2375.6 ccw(c2862.14,2342.27) 2815,2342.27
  Bottom Layer w20: J4.4@1890,2431.22 1929.22,2431.22 1944,2446 1944,2637 ; J3.4@1890,3006.22 1941.78,3006.22 1944,3004 ; J2.4@1890,3576.22 1928.78,3576.22 1944,3561 1944,3004 ; 1944,2613 1944,2637 ; v1(2093,2637) 1944,2637 ; v1(2485,2637) 2485,2367 2520,2332 v1(2815,2332) 2915,2332 ; v1(2915,3280) v1(2915,2965) v1(2915,2665) 2915,2332 ; U7.5@3320,2200 3320,2304 3292,2332 2915,2332 ; 1922.89,2431.22 ccw(c1922.89,2398.33) 1899.63,2421.59 cw(c1922.89,2398.33) 1922.89,2431.22 ; 1922.89,2431.22 cw(c1922.89,2464.11) 1899.63,2440.85 ccw(c1922.89,2464.11) 1922.89,2431.22 ; 1922.89,3006.22 ccw(c1922.89,2973.33) 1899.63,2996.59 cw(c1922.89,2973.33) 1922.89,3006.22 ; 1922.89,3006.22 cw(c1922.89,3039.11) 1899.63,3015.85 ccw(c1922.89,3039.11) 1922.89,3006.22 ; 1922.89,3576.22 ccw(c1922.89,3543.33) 1899.63,3566.59 cw(c1922.89,3543.33) 1922.89,3576.22 ; 1922.89,3576.22 cw(c1922.89,3609.11) 1899.63,3585.85 ccw(c1922.89,3609.11) 1922.89,3576.22 ; 1944,2637 1944,3004 ; 3320,2247.14 ccw(c3367.14,2247.14) 3333.81,2213.81 cw(c3367.14,2247.14) 3320,2247.14 ; 3320,2247.14 cw(c3272.86,2247.14) 3306.19,2213.81 ccw(c3272.86,2247.14) 3320,2247.14
12V: C2.2 C3.2 C5.2 C6.2 C8.2 C9.2 D1.2 D2.2 R8.1 U1.5 U2.5 U3.5 U7.8 | length 2349
  Top Layer w10: C3.2@2987.32,3731.61 R8.1@2987.32,3825 ; 2987.32,3812.32 ccw(c2975.62,3812.32) 2983.89,3820.59 cw(c2975.62,3812.32) 2987.32,3812.32 ; 2987.32,3812.32 cw(c2999.01,3812.32) 2990.74,3820.59 ccw(c2999.01,3812.32) 2987.32,3812.32 ; C3.2@2976.32,3773.32 ccw(c2949.77,3799.87) 2987.32,3799.87 cw(c2949.77,3799.87) C3.2@2976.32,3773.32 ; C3.2@2987.32,3783.52 ccw(c3011.74,3783.52) 2994.47,3766.25 cw(c3011.74,3783.52) C3.2@2987.32,3783.52 ; 2987.32,3807.66 ccw(c3035.88,3807.66) 3001.54,3773.32 cw(c3035.88,3807.66) 2987.32,3807.66
  Top Layer w20: v1@3256,2291 3604,2291 3620,2275 U7.8@3620,2200 ; U7.8@3606.19,2213.81 ccw(c3572.86,2247.14) 3620,2247.14 ccw(c3667.14,2247.14) U7.8@3633.81,2213.81
  Top Layer w50: D1.2@2732,3702.32 C3.2@2986,3702.32
  Bottom Layer w20: v1(2244,2364) 2244,2204 2286.84,2161.16 2472.19,2161.16 2602.03,2291 v1(3284,2291)
  other v1: 3255,2291 2215,2363 2215,2391 2244,2391 2216,2949 2244,2950 2216,2975 2244,2975 2216,3506 2244,3507 2215,3533 2243,3533 2377,3675 2407,3675 2435,3675 2377,3703 2407,3703 2435,3704 2377,3731 2407,3731 2435,3731
ADC_LI: C14.2 R9.2 U7.16 | length 3306.7
  Top Layer w15: R9.2@3206.68,3825 C14.2@3206.68,3780 3206.68,3713.32 3290,3630 v1(3334,3630) ; v1@4343,3482 v1(4343,3630)
  Bottom Layer w15: v1@3336,3630 v1(4343,3630) v1@4344,3630 ; v1@4343,3480 4343,3372 4290,3319 4109,3319 4078,3288 4078,2446 4153,2371 4349,2371 U7.16@4520,2200 ; U7.16@4497.97,2200 ccw(c4444.79,2200) 4482.4,2237.6 ccw(c4520,2275.21) U7.16@4520,2222.03
  other v1: 4343,3481
BEEP: R17.2 U7.46 | length 329
  Top Layer w10: U7.46@2942.66,4082.66 cw(c2900.79,4040.79) 2960,4040.79 cw(c3019.21,4040.79) U7.46@2977.34,4082.66 ; U7.46@2949.73,4089.73 cw(c2924.93,4064.93) 2960,4064.93 cw(c2995.07,4064.93) U7.46@2970.27,4089.73 ; U7.46@2960,4100 2960,4038 2990.32,4007.68 R17.2@2990.32,3950 ; R17.2@2986.89,3954.41 ccw(c2978.62,3962.68) 2990.32,3962.68 ccw(c3002.01,3962.68) R17.2@2993.74,3954.41
E1A: Q1.3 R4.2 U7.63 | length 3032
  Top Layer w10: R4.2@3044.68,3170 Q1.3@3084.37,3209.69 ; Q1.3@3084.37,3217.32 3087.05,3220 5241,3220 5520,3499 U7.63@5520,3500 ; 5477.42,3456.42 ccw(c5433.84,3500) U7.63@5495.47,3500 ; 5479.84,3458.84 cw(c5520,3418.67) U7.63@5520,3475.47 ; 5494.49,3473.49 ccw(c5467.99,3500) U7.63@5505.47,3500 ; 5496.91,3475.91 cw(c5520,3452.81) U7.63@5520,3485.47 ; R4.2@3044.68,3175.83 ccw(c3044.68,3189.89) 3054.63,3179.95 cw(c3044.68,3189.89) R4.2@3044.68,3175.83 ; R4.2@3049.53,3170.98 cw(c3058.84,3170.98) 3052.26,3177.57 ccw(c3058.84,3170.98) R4.2@3049.53,3170.98 ; 3056.76,3182.07 ccw(c3021.51,3217.32) 3071.36,3217.32 cw(c3021.51,3217.32) 3056.76,3182.07 ; 3073.83,3199.14 ccw(c3055.65,3217.32) 3081.36,3217.32 cw(c3055.65,3217.32) 3073.83,3199.14 ; Q1.3@3075.2,3200.51 cw(c3084.37,3191.34) 3084.37,3204.31 ccw(c3084.37,3191.34) Q1.3@3075.2,3200.51 ; Q1.3@3093.57,3208.12 cw(c3122.25,3179.45) 3122.25,3220 ccw(c3122.25,3179.45) Q1.3@3093.57,3208.12 ; Q1.3@3093.57,3226.52 ccw(c3109.32,3242.27) 3109.32,3220 cw(c3109.32,3242.27) Q1.3@3093.57,3226.52
E1B: Q2.3 R6.2 U7.64 | length 3596.1
  Top Layer w10: R6.2@2789.68,3170 Q2.3@2829.37,3209.69 ; Q2.3@2829.37,3217.32 2911.32,3217.32 2985.65,3143 3082,3143 3139,3200 5249.28,3200 5500.28,3451 5571,3451 U7.64@5620,3500 ; 2860.78,3217.32 ccw(c2860.78,3185.91) 2838.57,3208.12 cw(c2860.78,3185.91) 2860.78,3217.32 ; 2860.78,3217.32 cw(c2860.78,3248.74) 2838.57,3226.52 ccw(c2860.78,3248.74) 2860.78,3217.32 ; 5578.13,3458.13 ccw(c5536.26,3500) 5595.47,3500 cw(c5536.26,3500) 5578.13,3458.13 ; 5578.13,3458.13 cw(c5620,3416.26) 5620,3475.47 ccw(c5620,3416.26) 5578.13,3458.13 ; 5595.2,3475.2 ccw(c5570.4,3500) 5605.47,3500 cw(c5570.4,3500) 5595.2,3475.2 ; 5595.2,3475.2 cw(c5620,3450.4) 5620,3485.47 ccw(c5620,3450.4) 5595.2,3475.2 ; R6.2@2789.68,3175.83 ccw(c2789.68,3189.89) 2799.63,3179.95 cw(c2789.68,3189.89) R6.2@2789.68,3175.83 ; R6.2@2794.53,3170.98 cw(c2803.84,3170.98) 2797.26,3177.57 ccw(c2803.84,3170.98) R6.2@2794.53,3170.98 ; 2801.76,3182.07 ccw(c2766.51,3217.32) 2816.36,3217.32 cw(c2766.51,3217.32) 2801.76,3182.07 ; 2818.83,3199.14 ccw(c2800.65,3217.32) 2826.36,3217.32 cw(c2800.65,3217.32) 2818.83,3199.14 ; Q2.3@2820.2,3200.51 cw(c2829.37,3191.34) 2829.37,3204.31 ccw(c2829.37,3191.34) Q2.3@2820.2,3200.51
E2A: Q3.3 R11.2 U7.65 | length 3219.8
  Top Layer w10: R11.2@3039.68,2850 Q3.3@3079.37,2889.69 ; Q3.3@3079.37,2902.32 3079.37,3111.37 3148,3180 5257.57,3180 5477.57,3400 ; U7.65@5520,3400 5477.57,3400 ; 3079.37,2933.74 ccw(c3110.78,2933.74) 3088.57,2911.52 cw(c3110.78,2933.74) 3079.37,2933.74 ; 3079.37,2933.74 cw(c3047.96,2933.74) 3070.17,2911.52 ccw(c3047.96,2933.74) 3079.37,2933.74 ; 5477.57,3400 ccw(c5477.57,3424.44) 5498.75,3412.24 cw(c5477.57,3424.44) 5477.57,3400 ; 5477.57,3400 cw(c5477.57,3375.56) 5498.75,3387.76 ccw(c5477.57,3375.56) 5477.57,3400 ; R11.2@3039.68,2855.83 ccw(c3039.68,2869.89) 3049.63,2859.95 cw(c3039.68,2869.89) R11.2@3039.68,2855.83 ; R11.2@3044.53,2850.98 cw(c3053.84,2850.98) 3047.26,2857.57 ccw(c3053.84,2850.98) R11.2@3044.53,2850.98 ; R11.2@3048.22,2858.54 ccw(c3004.43,2902.32) 3066.36,2902.32 cw(c3004.43,2902.32) R11.2@3048.22,2858.54 ; 3065.29,2875.61 ccw(c3038.58,2902.32) 3076.36,2902.32 cw(c3038.58,2902.32) 3065.29,2875.61
E2B: Q4.3 R13.2 U7.66 | length 3880.4
  Top Layer w10: R13.2@2789.68,2850 Q4.3@2829.37,2889.69 ; Q4.3@2829.37,2902.32 2887.68,2902.32 2975,2815 3098,2815 3120,2837 3120,3122 3158,3160 5265.85,3160 5457.85,3352 5572,3352 U7.66@5620,3400 ; 2860.78,2902.32 ccw(c2860.78,2870.91) 2838.57,2893.12 cw(c2860.78,2870.91) 2860.78,2902.32 ; 2860.78,2902.32 cw(c2860.78,2933.74) 2838.57,2911.52 ccw(c2860.78,2933.74) 2860.78,2902.32 ; 5578.13,3358.13 ccw(c5536.26,3400) 5595.47,3400 cw(c5536.26,3400) 5578.13,3358.13 ; 5578.13,3358.13 cw(c5620,3316.26) 5620,3375.47 ccw(c5620,3316.26) 5578.13,3358.13 ; 5595.2,3375.2 ccw(c5570.4,3400) 5605.47,3400 cw(c5570.4,3400) 5595.2,3375.2 ; 5595.2,3375.2 cw(c5620,3350.4) 5620,3385.47 ccw(c5620,3350.4) 5595.2,3375.2 ; R13.2@2789.68,2855.83 ccw(c2789.68,2869.89) 2799.63,2859.95 cw(c2789.68,2869.89) R13.2@2789.68,2855.83 ; R13.2@2794.53,2850.98 cw(c2803.84,2850.98) 2797.26,2857.57 ccw(c2803.84,2850.98) R13.2@2794.53,2850.98 ; R13.2@2798.22,2858.54 ccw(c2754.43,2902.32) 2816.36,2902.32 cw(c2754.43,2902.32) R13.2@2798.22,2858.54 ; 2815.29,2875.61 ccw(c2788.58,2902.32) 2826.36,2902.32 cw(c2788.58,2902.32) 2815.29,2875.61
E3A: Q6.3 R15.2 U7.67 | length 3629.1
  Top Layer w10: R15.2@3044.68,2550 Q6.3@3084.37,2589.69 ; Q6.3@3084.37,2602.32 3140,2657.95 3140,3102 3178,3140 5274.14,3140 5434.14,3300 U7.67@5520,3300 ; 3106.58,2624.54 ccw(c3128.8,2602.32) 3097.38,2602.32 cw(c3128.8,2602.32) 3106.58,2624.54 ; 3106.58,2624.54 cw(c3084.37,2646.75) 3084.37,2615.33 ccw(c3084.37,2646.75) 3106.58,2624.54 ; 5460.79,3300 ccw(c5460.79,3359.21) 5502.66,3317.34 cw(c5460.79,3359.21) 5460.79,3300 ; 5460.79,3300 cw(c5460.79,3240.79) 5502.66,3282.66 ccw(c5460.79,3240.79) 5460.79,3300 ; 5484.93,3300 ccw(c5484.93,3335.07) 5509.73,3310.27 cw(c5484.93,3335.07) 5484.93,3300 ; 5484.93,3300 cw(c5484.93,3264.93) 5509.73,3289.73 ccw(c5484.93,3264.93) 5484.93,3300 ; R15.2@3044.68,2555.83 ccw(c3044.68,2569.89) 3054.63,2559.95 cw(c3044.68,2569.89) R15.2@3044.68,2555.83 ; R15.2@3049.53,2550.98 cw(c3058.84,2550.98) 3052.26,2557.57 ccw(c3058.84,2550.98) R15.2@3049.53,2550.98 ; R15.2@3053.22,2558.54 ccw(c3009.43,2602.32) 3071.36,2602.32 cw(c3009.43,2602.32) R15.2@3053.22,2558.54 ; 3070.29,2575.61 ccw(c3043.58,2602.32) 3081.36,2602.32 cw(c3043.58,2602.32) 3070.29,2575.61
E3B: Q7.3 R19.2 U7.68 | length 4076.9
  Top Layer w10: R19.2@2784.68,2550 Q7.3@2824.37,2589.69 ; Q7.3@2824.37,2602.32 2903.68,2602.32 2985,2521 3088,2521 3160,2593 3160,3072 3208,3120 5282.42,3120 5414.42,3252 5572,3252 U7.68@5620,3300 ; 2855.78,2602.32 ccw(c2855.78,2570.91) 2833.57,2593.12 cw(c2855.78,2570.91) 2855.78,2602.32 ; 2855.78,2602.32 cw(c2855.78,2633.74) 2833.57,2611.52 ccw(c2855.78,2633.74) 2855.78,2602.32 ; 5578.13,3258.13 ccw(c5536.26,3300) 5595.47,3300 cw(c5536.26,3300) 5578.13,3258.13 ; 5578.13,3258.13 cw(c5620,3216.26) 5620,3275.47 ccw(c5620,3216.26) 5578.13,3258.13 ; 5595.2,3275.2 ccw(c5570.4,3300) 5605.47,3300 cw(c5570.4,3300) 5595.2,3275.2 ; 5595.2,3275.2 cw(c5620,3250.4) 5620,3285.47 ccw(c5620,3250.4) 5595.2,3275.2 ; R19.2@2784.68,2555.83 ccw(c2784.68,2569.89) 2794.63,2559.95 cw(c2784.68,2569.89) R19.2@2784.68,2555.83 ; R19.2@2789.53,2550.98 cw(c2798.84,2550.98) 2792.26,2557.57 ccw(c2798.84,2550.98) R19.2@2789.53,2550.98 ; R19.2@2793.22,2558.54 ccw(c2749.43,2602.32) 2811.36,2602.32 cw(c2749.43,2602.32) R19.2@2793.22,2558.54 ; 2810.29,2575.61 ccw(c2783.58,2602.32) 2821.36,2602.32 cw(c2783.58,2602.32) 2810.29,2575.61